# Altium PCB 深圳重合闸控制板.PcbDoc (part 1 of 2)
Units mm, origin at the board's own origin, x right, y up, seen from the top; angles counter-clockwise.
Board outline 137 x 115 mm, 2 copper layers (Top Layer, Bottom Layer); 314 components, 196 nets, 866 pads, 368 vias.
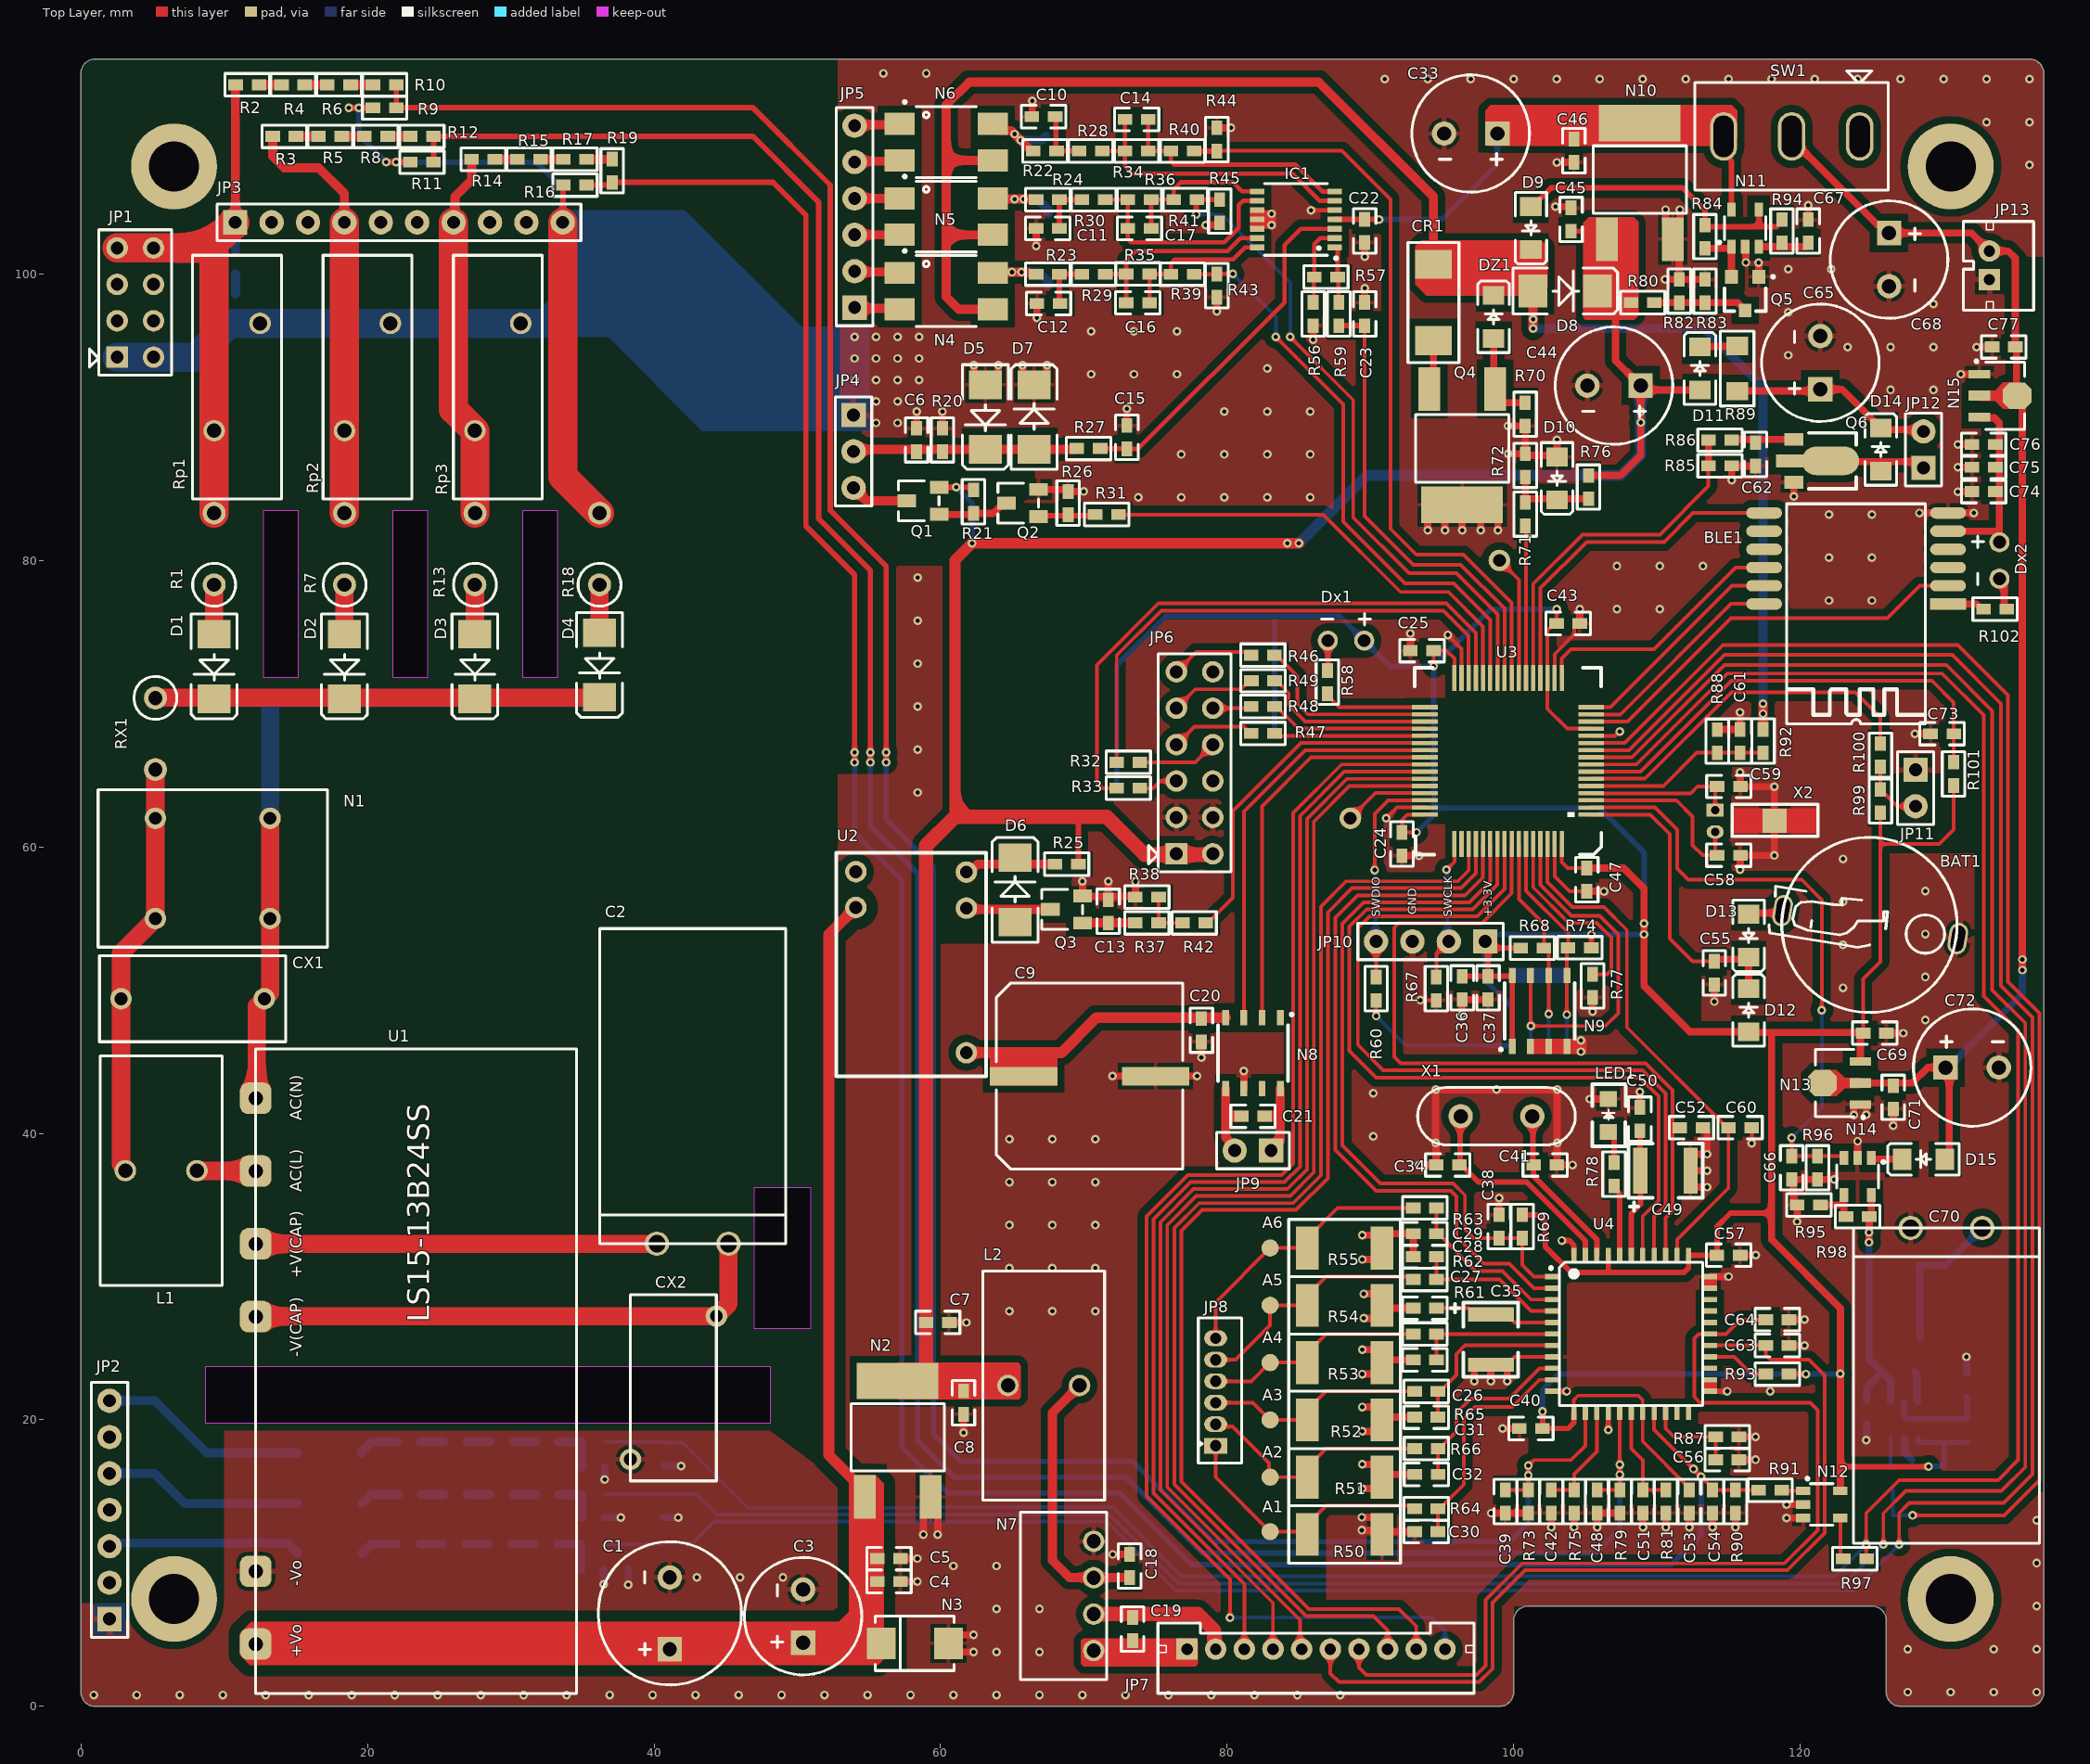
[diagram p0: Top Layer view]
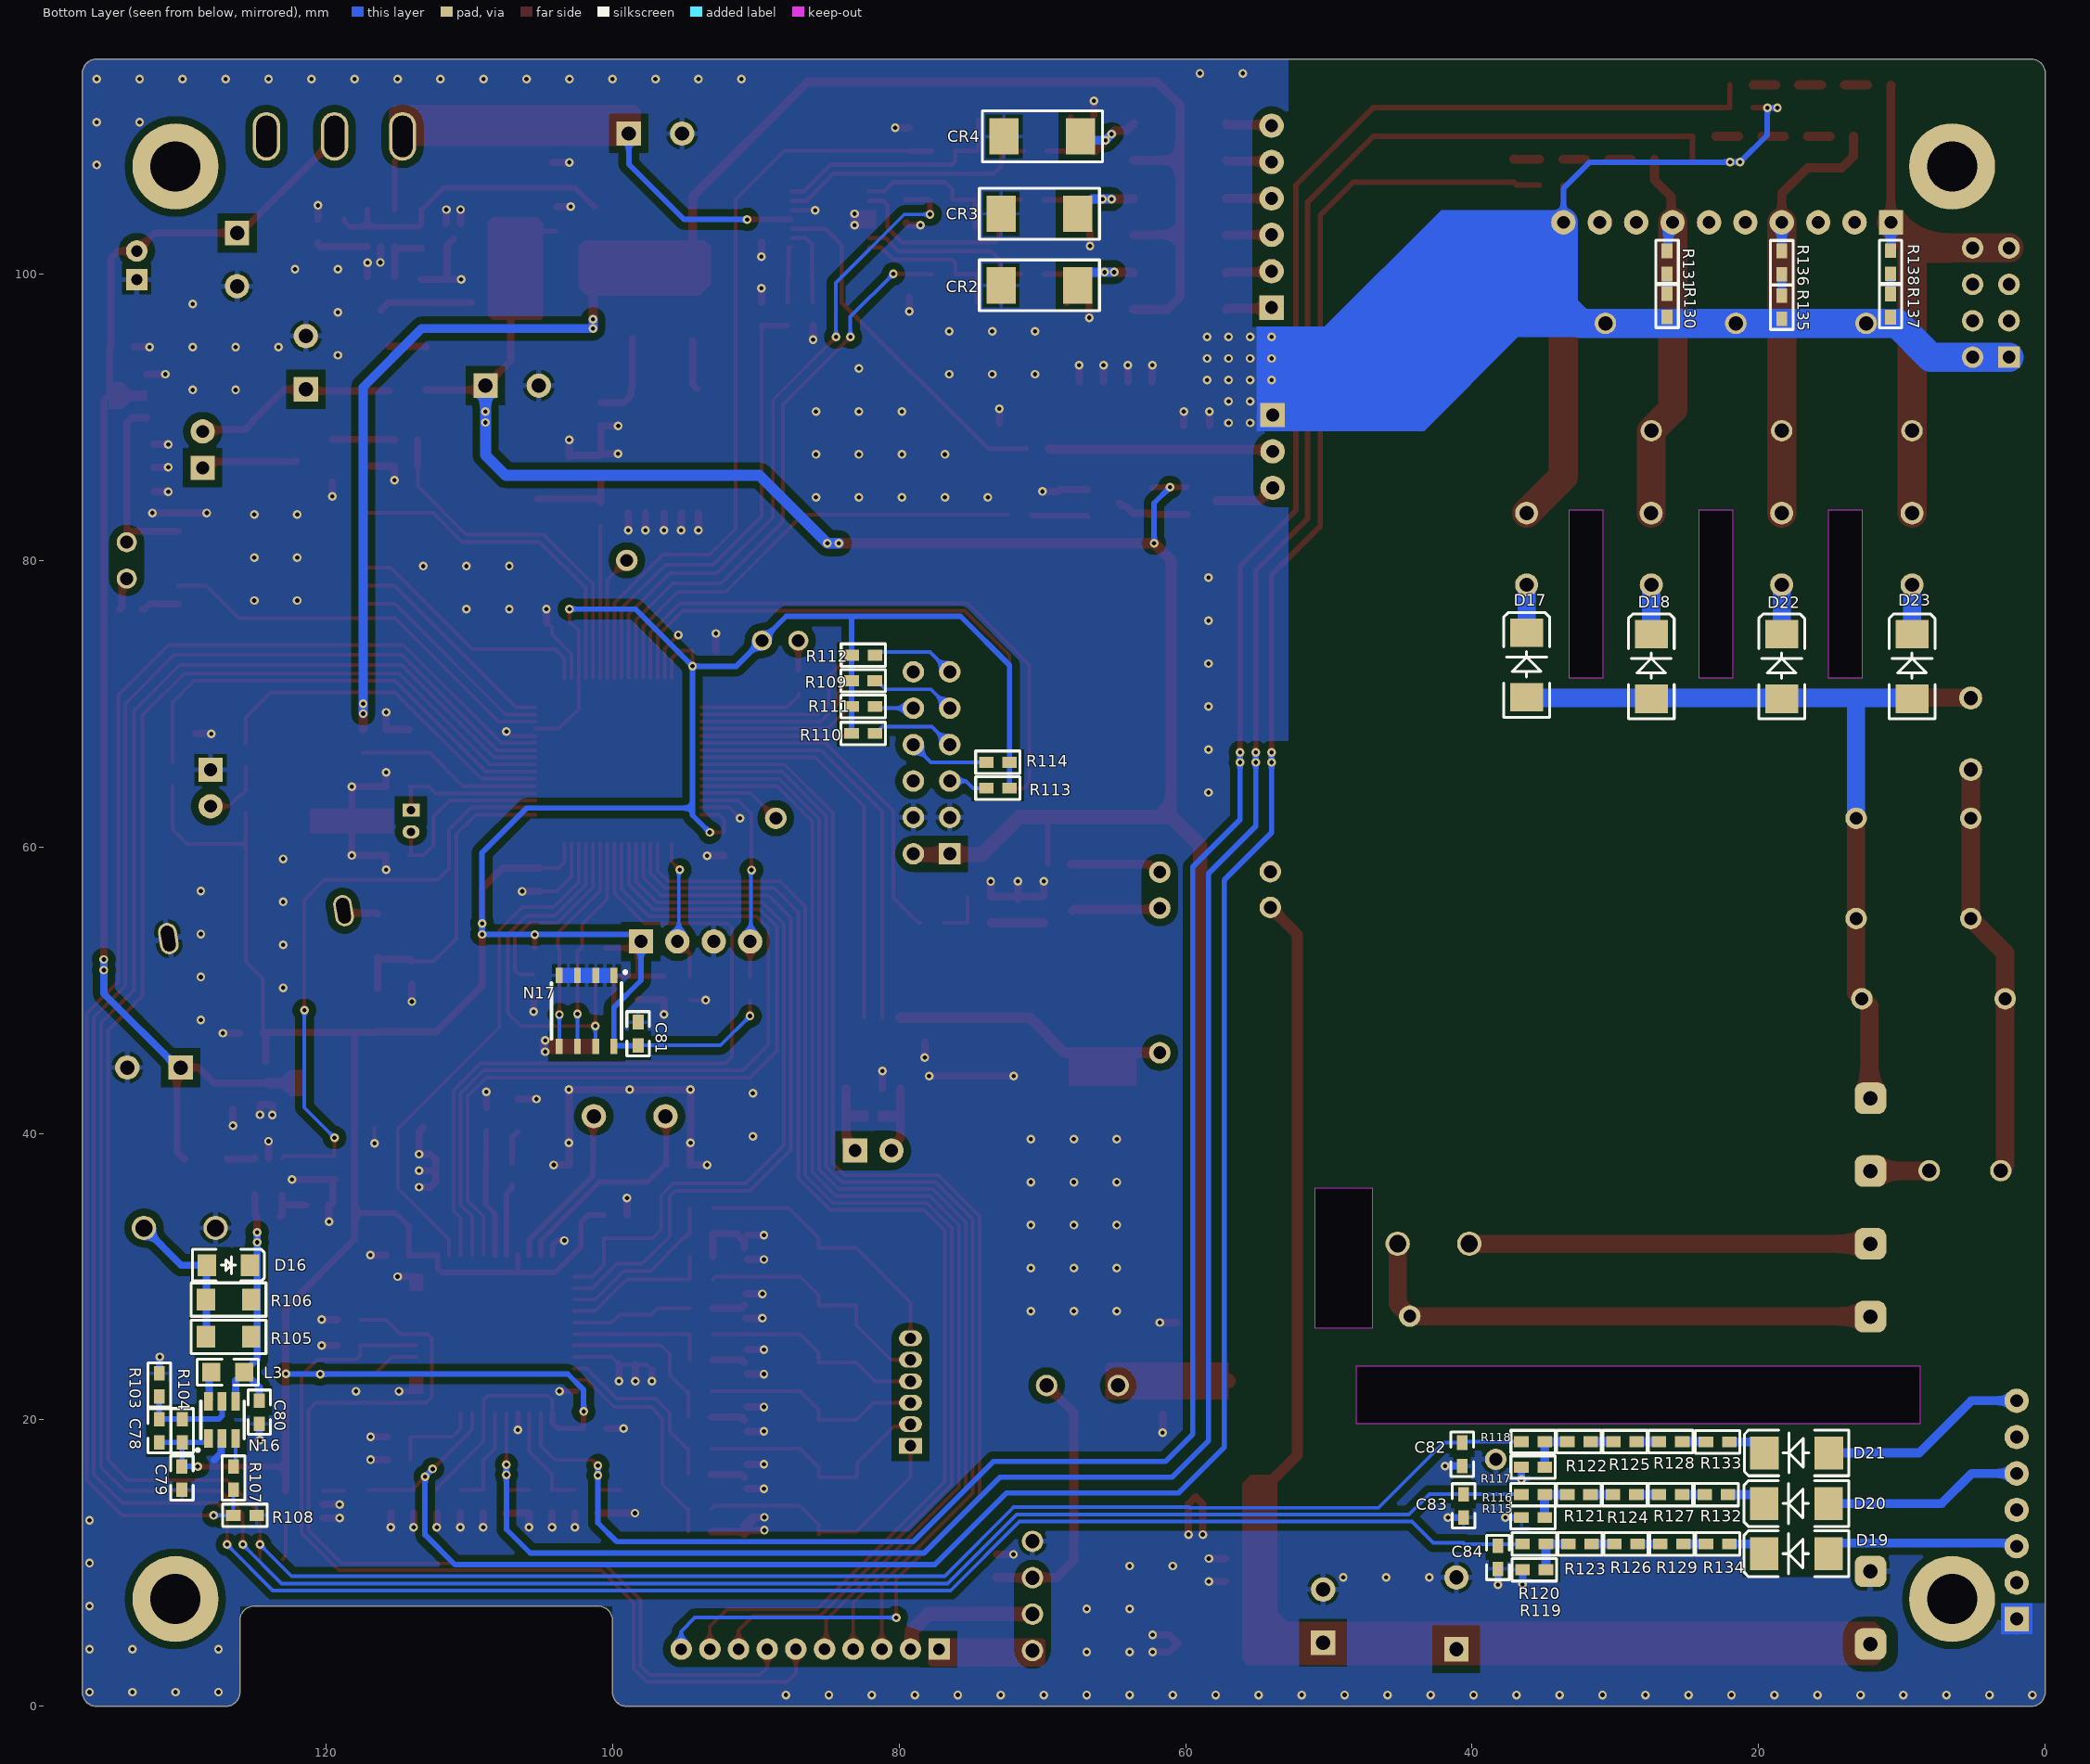
[diagram p1: Bottom Layer view, seen from below]

## Layer stack, top to bottom
Top Solder: solder mask 0.0102, Solder Resist, Dk 3.5
Top Layer: signal copper 0.0356
Dielectric 1: dielectric 0.32, FR-4, Dk 4.8
Bottom Layer: signal copper 0.0356
Bottom Solder: solder mask 0.0102, Solder Resist, Dk 3.5

## Board outline
0,1 ccw(c1,1) 1,0 99,0 ccw(c99,1) 100,1 100,6 cw(c101,6) 101,7 125,7 cw(c125,6) 126,6 126,1 ccw(c127,1) 127,0 136,0 ccw(c136,1) 137,1 137,114 ccw(c136,114) 136,115 1,115 ccw(c1,114) 0,114
cut-out: 46.966,36.2 46.966,26.4 50.966,26.4 50.966,36.2
cut-out: 48.1,23.745 48.1,19.745 8.7,19.745 8.7,23.745
cut-out: 30.846,83.5 33.246,83.5 33.246,71.8 30.846,71.8
cut-out: 21.8,83.5 24.2,83.5 24.2,71.8 21.8,71.8
cut-out: 12.745,83.5 15.145,83.5 15.145,71.8 12.745,71.8

## Design rules (kind name [scope] priority, off if disabled: settings)
Clearance Clearance_1 [InNet('+24V')] p1: gap=0.254 ignorepadtopadclearanceinfootprint=FALSE except(0: Arc-Hole Track-Hole SMDPad-Hole THPad-Hole Via-Hole Fill-Hole Poly-Hole Region-Hole Text-Hole; 0.2: SMDPad-SMDPad; 0.203: Track-SMDPad; 0.229: Track-Track; 0.8: Arc-Poly Track-Poly SMDPad-Poly THPad-Poly Via-Poly Fill-Poly Poly-Poly Poly-Region)
Clearance [All] p2: gap=0.254 ignorepadtopadclearanceinfootprint=FALSE except(0: Arc-Hole Track-Hole SMDPad-Hole THPad-Hole Via-Hole Fill-Hole Poly-Hole Region-Hole Text-Hole; 0.2: SMDPad-SMDPad; 0.203: Track-SMDPad; 0.229: Track-Track; 0.508: Arc-Poly Track-Poly SMDPad-Poly THPad-Poly Via-Poly Fill-Poly Poly-Poly Poly-Region)
ComponentClearance [All] p1 off: gap=0.254 collisioncheckmode=3 verticalgap=0.254 showdistances=FALSE
HoleSize [All] p1: absolutevalues=TRUE maxlimit=5 minlimit=0.025 maxpercent=80.000 minpercent=20.000
MinimumSolderMaskSliver [All] p1 off: minsoldermaskwidth=0.1
PolygonConnect [All] p1: thpad.connectstyle=Relief thpad.reliefconductorwidth=0.381 thpad.reliefentries=4 thpad.polygonreliefangle="90 Angle" thpad.airgapwidth=0.254 smdpad.connectstyle=Relief smdpad.reliefconductorwidth=0.254 smdpad.reliefentries=4 smdpad.polygonreliefangle="90 Angle" smdpad.airgapwidth=0.254 via.connectstyle=Direct via.reliefconductorwidth=0.254 via.reliefentries=4 via.polygonreliefangle="90 Angle" via.airgapwidth=0.254
RoutingVias [All] p1: holewidth=0.305 width=0.61 viastyle="Through Hole" minholewidth=0.2 minwidth=0.4 maxholewidth=0.711 maxwidth=1.27 useviatemplates=TRUE viatemplateguid#1={6C4FC0D5-3B55-4C98-B31F-713A288D57C1} viatemplatename#1=v61h30m0mx0
SilkToSilkClearance [All] p1 off: silktosilkclearance=0.254
SilkToSolderMaskClearance [IsPad] p1 off: minsilkscreentomaskgap=0.254 clearancetoexposedcopper=TRUE
SolderMaskExpansion [All] p1: expansion=0.102 istentingtop=FALSE
Width [All] p1: maxlimit=2.032 minlimit=0.254 preferedwidth=0.254 minimp=50.000000 maximp=50.000000 favimp=50.000000
25 further rules are at their usual default settings.

## Classes and differential pairs
component class 深圳重合闸控制板: A1 A2 A3 A4 A5 A6 BAT1 BLE1 C7 C14 C16 C24 C25 C26 C27 C35 C39 C41 C44 C46 C47 C48 C49 C50 C52 C56 C57 C59 C60 C61 C62 C63 C64 C65 C66 C67 C68 C69 C70 C72 C75 C76 C77 C79 C80 C81 C84 CR3 CX1 CX2 D1 D2 D5 D8 D14 D16 D17 D20 D21 D22 D23 Dx2 DZ1 IC1 JP5 JP6 JP7 JP8 JP9 JP12 L1 L2 L3 LED1 N2 N10 N11 N12 N15 N16 Q1 Q4 Q5 R4 R5 R7 R10 R12 R16 R19 R21 R23 R27 R30 R34 R36 R38 R39 R40 R42 R43 R50 R51 R54 R55 R56 R64 R66 R67 R68 R69 R71 R73 R75 R76 R77 R82 R83 R84 R85 R88 R89 R90 R91 R92 R93 R96 R97 R100 R101 R103 R105 R106 R107 R109 R113 R114 R115 R119 R121 R122 R123 R125 R127 R129 R130 R132 R133 R134 R136 R137 R138 Rp1 Rp2 SW1 U1 U4 X2

## Components (designator, comment, footprint, x,y, rotation, side; value= is the part's Value field where it differs from the comment)
A1 "TP" TP 83,12.2 r0 top
A2 "TP" TP 83,16 r0 top
A3 "TP" TP 83,20 r0 top
A4 "TP" TP 83,24 r0 top
A5 "TP" TP 83,28 r0 top
A6 "TP" TP 83,32 r0 top
BAT1 "" BATTERY 131,53.6 r180 top
BLE1 "BLE-TPT-BLUETEETH" 蓝牙 123.2,76.2 r180 top
C1 "470uF/35V" CAP_5.0SP 41.1,6.5 r90 top (schematic designator C60)
C2 "33uF/450V" EWH2WM330K20OT 42.7,32.3 r0 top (schematic designator C63)
C3 "220uF/35V" CAP 50.4,6.3 r90 top (schematic designator C61)
C4 "0.1uF/50V" C0603 56.395,8.719 r180 top (schematic designator C62)
C5 "0.33uF/35V" C0603 56.395,10.319 r180 top (schematic designator C65)
C6 "0.1uF" C0603 58.327,88.41 r270 top (schematic designator C46)
C7 "0.1uF/25V" C0603 59.8,26.8 r180 top (schematic designator C66)
C8 "2.2uF/25V" C0603 61.6,21.2 r90 top (schematic designator C67)
C9 "470uF/50V" RVT1H471M1213 70.4,44 r0 top (schematic designator C70)
C10 "0.1uF" C0603 67.187,110.981 r0 top (schematic designator C24)
C11 "0.1uF" C0603 67.482,103.181 r0 top (schematic designator C14)
C12 "0.1uF" C0603 67.533,97.93 r0 top (schematic designator C3)
C13 "0.1uF" C0603 71.7,55.5 r270 top (schematic designator C72)
C14 "1nF" C0603 73.682,110.781 r180 top (schematic designator C25)
C15 "0.1uF" C0603 73,88.6 r270 top (schematic designator C48)
C16 "1nF" C0603 73.765,97.982 r180 top (schematic designator C5)
C17 "1nF" C0603 73.882,103.181 r180 top (schematic designator C16)
C18 "2.2uF/25V" C0603 73.2,9.8 r270 top (schematic designator C68)
C19 "2.2uF/25V" C0603 73.4,5.4 r270 top (schematic designator C69)
C20 "0.1uF/50V" C0603 78.2,47.2 r90 top (schematic designator C71)
C21 "0.1uF/50V" C0603 81.8,41.2 r180 top (schematic designator C64)
C22 "0.1uF" C0603 89.6,103 r90 top (schematic designator C35)
C23 "0.1uF" C0603 89.6,97.2 r90 top (schematic designator C47)
C24 "0.1uF" C0603 92.2,60.2 r270 top (schematic designator C40)
C25 "0.1uF" C0603 93.6,73.7 r180 top (schematic designator C41)
C26 "10nF" C0603 93.8,24.194 r0 top (schematic designator C20)
C27 "120nF" C0603 93.8,27.8 r180 top (schematic designator C19)
C28 "10nF" C0603 93.8,31.4 r0 top (schematic designator C26)
C29 "10nF" C0603 93.8,33 r0 top (schematic designator C28)
C30 "10nF" C0603 93.895,12.2 r0 top (schematic designator C4)
C31 "10nF" C0603 93.897,20.187 r0 top (schematic designator C15)
C32 "10nF" C0603 93.905,16.2 r0 top (schematic designator C12)
C33 "220uF-16V" CAP 97,109.8 r180 top (schematic designator C51)
C34 "22pF" C0603 95.4,37.8 r180 top (schematic designator C11)
C35 "4.7UF/25V" CAK 98.4,25.6 r270 top (schematic designator C22)
C36 "0.1uF" C0603 96.407,50.156 r270 top (schematic designator C34)
C37 "0.1uF" c0603 98.207,50.156 r270 top (schematic designator C56)
C38 "120nF" C0603 98.986,33.505 r90 top (schematic designator C18)
C39 "10nF" C0603 99.419,14.305 r270 top (schematic designator C31)
C40 "0.1uF" C0603 101.2,19.4 r180 top (schematic designator C27)
C41 "22pF" C0603 102.2,37.8 r0 top (schematic designator C8)
C42 "10nF" C0603 102.619,14.305 r270 top (schematic designator C36)
C43 "0.1uF" C0603 103.8,75.6 r0 top (schematic designator C38)
C44 "220uF-35V" CAP 107,92.2 r180 top (schematic designator C33)
C45 "0.1uF" C0603 104,103.8 r270 top (schematic designator C49)
C46 "0.1uF" C0603 104.2,108.6 r270 top (schematic designator C50)
C47 "0.1uF" C0603 105.1,57.713 r270 top (schematic designator C39)
C48 "10nF" C0603 105.819,14.305 r270 top (schematic designator C42)
C49 "4.7UF/25V" CAK 110.6,37.4 r0 top (schematic designator C1)
C50 "0.1uF" C0603 108.8,41 r270 top (schematic designator C2)
C51 "10nF" C0603 109.019,14.305 r270 top (schematic designator C44)
C52 "110pF" C0603 112.4,40.4 r180 top (schematic designator C10)
C53 "120nF" C0603 112.257,14.305 r90 top (schematic designator C43)
C54 "10nF" C0603 113.876,14.305 r90 top (schematic designator C37)
C55 "0.1uF" C0603 114,51.2 r270 top (schematic designator C9)
C56 "10nF" C0603 114.907,17.219 r180 top (schematic designator C32)
C57 "0.1uF" C0603 115,31.5 r180 top (schematic designator C83)
C58 "15pF" C0603 115.013,59.419 r0 top (schematic designator C7)
C59 "15pF" C0603 115.013,64.219 r180 top (schematic designator C6)
C60 "110pF" C0603 115.8,40.4 r180 top (schematic designator C13)
C61 "0.1uF" C0603 115.794,67.387 r90 top (schematic designator C17)
C62 "1nF" C0603 116.879,87.4 r270 top (schematic designator C29)
C63 "10nF" C0603 118.4,25.2 r180 top (schematic designator C23)
C64 "10nF" C0603 118.4,27 r180 top (schematic designator C21)
C65 "470uF-25V" CAP 121.4,93.8 r90 top (schematic designator C30)
C66 "10nF" C0603 119.4,37.6 r270 top (schematic designator C76)
C67 "0.1uF" C0603 120.55,102.987 r90 top (schematic designator C52)
C68 "470uF-16V" CAP 126.2,101 r270 top (schematic designator C75)
C69 "0.1uF" C0603 125.2,47 r180 top (schematic designator C53)
C70 "10F/2.7V" EWH2WM330K20OT 130.2,33.4 r180 top (schematic designator C81)
C71 "0.1uF" C0603 126.489,42.517 r90 top (schematic designator C54)
C72 "470uF-16V" CAP 132,44.6 r0 top (schematic designator C55)
C73 "0.1uF" C0603 129.9,67.9 r180 top (schematic designator C84)
C74 "10uF" C0603 132.8,84.8 r0 top (schematic designator C59)
C75 "0.1uF" C0603 132.8,86.5 r0 top (schematic designator C73)
C76 "0.1uF" C0603 132.8,88.1 r0 top (schematic designator C58)
C77 "0.1uF" C0603 134.2,94.9 r0 top (schematic designator C74)
C78 "10pF" C0603 131.631,19.242 r270 bottom (schematic designator C77)
C79 "1uF" C0603 130.05,15.938 r270 bottom (schematic designator C78)
C80 "10uF" C0603 124.65,20.538 r270 bottom
C81 "0.1uF" c0603 98.207,46.956 r90 bottom (schematic designator C57)
C82 "0.1uF" C0603 40.7,17.6 r270 bottom (schematic designator C45)
C83 "0.1uF" C0603 40.6,14 r270 bottom (schematic designator C79)
C84 "0.1uF" C0603 38.2,10.4 r270 bottom (schematic designator C82)
CR1 "1R00" R2010 94.4,98 r90 top (schematic designator CR4)
CR2 "2R20" R2010 70.2,99.2 r180 bottom (schematic designator CR1)
CR3 "2R20" R2010 70.2,104.2 r180 bottom (schematic designator CR2)
CR4 "2R20" R2010 70,109.6 r180 bottom (schematic designator CR3)
CX1 "0.1uF/310VAC" X2-0310A104K10WLBY 7.8,49.4 r180 top
CX2 "2.2nF/400VAC" CT81-400VAC-222M 41.354,22.245 r90 top
D1 "8F2K" IN4007-M7 9.3,72.6 r0 top (schematic designator D11)
D2 "8F2K" IN4007-M7 18.4,72.6 r0 top (schematic designator D13)
D3 "8F2K" IN4007-M7 27.5,72.6 r0 top (schematic designator D14)
D4 "8F2K" IN4007-M7 36.2,72.7 r0 top (schematic designator D16)
D5 "IN4007-M7" IN4007-M7 63.127,90.01 r0 top
D6 "IN4007" IN4007-M7 65.2,57 r180 top (schematic designator D18)
D7 "IN4007-M7" IN4007-M7 66.527,90.01 r180 top (schematic designator D6)
D8 "IN4007-M7" IN4007-M7 103.6,98.8 r90 top (schematic designator D7)
D9 "IN4148-T4" IN4148-T4 101.2,103.2 r0 top (schematic designator D8)
D10 "IN4148-T4" IN4148-T4 103.022,85.721 r0 top (schematic designator D9)
D11 "IN4007W" IN4148-T4 113,93.4 r180 top (schematic designator D4)
D12 "IN4148-T4" IN4148-T4 116.394,48.6 r180 top (schematic designator D1)
D13 "IN4148-T4" IN4148-T4 116.394,53.8 r0 top (schematic designator D2)
D14 "SM4007PL /A7" IN4148-T4 125.611,87.743 r180 top (schematic designator D3)
D15 "FR107W /F7" IN4148-T4 128.6,38.2 r270 top (schematic designator D20)
D16 "FR107W /F7" IN4148-T4 126.8,30.8 r90 bottom (schematic designator D19)
D17 "8F2K" IN4007-M7 36.2,72.7 r0 bottom
D18 "8F2K" IN4007-M7 27.5,72.6 r0 bottom (schematic designator D15)
D19 "8F2K" IN4007-M7 17.371,10.662 r270 bottom (schematic designator D23)
D20 "8F2K" IN4007-M7 17.371,14.162 r270 bottom (schematic designator D22)
D21 "8F2K" IN4007-M7 17.35,17.7 r270 bottom
D22 "8F2K" IN4007-M7 18.4,72.6 r0 bottom (schematic designator D12)
D23 "8F2K" IN4007-M7 9.3,72.6 r0 bottom (schematic designator D10)
Dx1 "LED" LEDB 88.3,74.4 r180 top (schematic designator Dx2)
Dx2 "LEDA" LEDB 133.9,80 r270 top (schematic designator Dx1)
DZ1 "稳压 MMSZ15VCW /15VZ" IN4148-T4 98.6,97 r180 top
IC1 "MCP6004-I/ST" SOP14_0.65SP 84.8,103.8 r90 top
JP1 "CON8" SIP2*4_2.54SP 3.8,98 r90 top (schematic designator JP8)
JP2 "CON7" HDR2.54-7P 2,13.72 r90 top (schematic designator JP13)
JP3 "CON10" HDR2.54-10P 22.2,103.6 r0 top (schematic designator JP6)
JP4 "CON-3" HDR2.54-3P 53.927,87.61 r270 top (schematic designator JP5)
JP5 "CON-6" HDR2.54-6P 54,104 r90 top (schematic designator JP1)
JP6 "CON12" SIP2*6_2.54SP 77.73,65.87 r90 top (schematic designator JP7)
JP7 "CON10" PH2.0-10P 86.2,4 r0 top (schematic designator JP9)
JP8 "" SIP1*6_1.5SP 79.2,18.2 r90 top (schematic designator JP2)
JP9 "CON-2" HDR2.54-2P 81.8,38.8 r180 top (schematic designator JP11)
JP10 "CON4" HDR2.54-4P 94.2,53.4 r180 top (schematic designator JP12)
JP11 "CON-2" HDR2.54-2P 128.049,64.111 r270 top (schematic designator JP3)
JP12 "CON-2" HDR2.54-2P 128.601,87.731 r90 top (schematic designator JP4)
JP13 "CON-2" PH2.0-2P 133.2,100.6 r90 top (schematic designator JP10)
L1 "LDM 1.2mH" PDMTAT044125-6R8MLU 5.6,37.4 r90 top
L2 "LDM 6.8uH" PDMTAT044125-6R8MLU 67.2,22.4 r90 top
L3 "20uH" L0805 126.85,23.338 r0 bottom
LED1 "LEDA" LEDA 106.6,42.4 r0 top
N1 "LCM，60mH" LCM 9.2,58.5 r90 top (schematic designator N17)
N2 "CJ78M12" TO-252(DPAK) 57,18.8 r0 top (schematic designator N10)
N3 "SMBJ30A" SMBJ30A 58.2,4.4 r0 top (schematic designator N9)
N4 "MB6S" MB6S 60.4,98.8 r0 top (schematic designator N1)
N5 "MB6S" MB6S 60.4,104 r0 top (schematic designator N2)
N6 "MB6S" MB6S 60.4,109.2 r0 top (schematic designator N3)
N7 "B1212S-1WL" B1212S-1WL 68.585,7.712 r270 top (schematic designator N11)
N8 "MX302" SOP8_1.27SP_4*5SR 81.8,45.6 r270 top (schematic designator N12)
N9 "BL24C256A" SOP8_1.27SP_4*5SR 101.807,48.556 r90 top (schematic designator N8)
N10 "78M05" 78M05 108.8,106.6 r0 top (schematic designator N4)
N11 "LM321A-TR" SOT23-5 116.15,103.2 r90 top (schematic designator N5)
N12 "SOT23-5" SOT23-5 121.5,14.1 r0 top (schematic designator N14)
N13 "HT7533-1" HT7533-1 122.394,43.517 r90 top (schematic designator N6)
N14 "RS3236-ADJ8YF5" SOT23-5 124,37 r270 top (schematic designator N15)
N15 "HT7533-1" HT7533-1 134.3,91.5 r270 top (schematic designator N13)
N16 "SOT23-6" SOT23-6 127.25,19.995 r90 bottom
N17 "BL24C256A" SOP8_1.27SP_4*5SR 101.807,48.556 r270 bottom (schematic designator N7)
Q1 "SS8550" "S8050 /J3Y" 59.894,85.11 r90 top (schematic designator Q2)
Q2 "L8050QLT1G" "S8050 /J3Y" 66.84,84.95 r90 top (schematic designator Q4)
Q3 "L8050QLT1G" "S8050 /J3Y" 69.902,56.587 r90 top (schematic designator Q6)
Q4 "DH2240N06LD" 78M05 96.4,87.8 r180 top (schematic designator Q5)
Q5 "LN61CN2702MR-G" SOT23-3 116.15,98.8 r180 top (schematic designator Q3)
Q6 "BCX56-16/BL" BCX56-16/BL 119.55,85.45 r270 top (schematic designator Q1)
R1 "120R" 插针电阻#1 9.3,80.3 r90 top (schematic designator R65)
R2 "510K" R0603 11.613,113.2 r0 top (schematic designator R75)
R3 "510K" R0603 14.2,109.6 r0 top (schematic designator R73)
R4 "510K" R0603 14.813,113.2 r0 top (schematic designator R81)
R5 "510K" R0603 17.4,109.6 r0 top (schematic designator R79)
R6 "510K" R0603 18.013,113.2 r0 top (schematic designator R84)
R7 "120R" 插针电阻#2 18.4,80.3 r90 top (schematic designator R67)
R8 "510K" R0603 20.6,109.6 r0 top (schematic designator R83)
R9 "5.1K" R0603 21.2,111.6 r0 top (schematic designator R90)
R10 "510K" R0603 21.2,113.2 r0 top (schematic designator R87)
R11 "5.1K" R0603 23.8,107.8 r0 top (schematic designator R89)
R12 "510K" R0603 23.8,109.6 r0 top (schematic designator R86)
R13 "120R" 插针电阻#3 27.506,80.3 r90 top (schematic designator R68)
R14 "510K" R0603 28.079,108 r0 top (schematic designator R71)
R15 "510K" R0603 31.279,108 r0 top (schematic designator R77)
R16 "5.1K" R0603 34.479,106.2 r0 top (schematic designator R88)
R17 "510K" R0603 34.479,108 r0 top (schematic designator R82)
R18 "120R" 插针电阻#1 36.2,80.3 r90 top (schematic designator R69)
R19 "510K" R0603 37.079,107.2 r270 top (schematic designator R85)
R20 "300" R0603 60.127,88.41 r270 top (schematic designator R52)
R21 "10K" R0603 62.3,84.1 r90 top (schematic designator R45)
R22 "300" R0603 67.282,108.581 r180 top (schematic designator R23)
R23 "300" R0603 67.482,99.981 r180 top (schematic designator R2)
R24 "300" R0603 67.482,105.181 r180 top (schematic designator R12)
R25 "10K" R0603 68.8,58.8 r180 top (schematic designator R93)
R26 "10K" R0603 68.9,84 r270 top (schematic designator R42)
R27 "5.1K" R0603 70.327,87.81 r180 top (schematic designator R50)
R28 "2K" R0603 70.482,108.581 r180 top (schematic designator R24)
R29 "2K" R0603 70.682,99.981 r180 top (schematic designator R3)
R30 "2K" R0603 70.682,105.181 r180 top (schematic designator R13)
R31 "1K" R0603 71.6,83.2 r180 top (schematic designator R39)
R32 "100R" R0603 73.1,65.906 r180 top (schematic designator R101)
R33 "100R" R0603 73.1,64.1 r180 top (schematic designator R103)
R34 "3.6K" R0603 73.682,108.581 r180 top (schematic designator R28)
R35 "3.6K" R0603 73.765,99.994 r180 top (schematic designator R5)
R36 "3.6K" R0603 73.882,105.181 r180 top (schematic designator R15)
R37 "2K" R0603 74.4,54.7 r180 top (schematic designator R91)
R38 "10R" R0603 74.4,56.5 r180 top (schematic designator R92)
R39 "2K" R0603 76.882,99.981 r180 top (schematic designator R1)
R40 "2K" R0603 76.882,108.581 r180 top (schematic designator R22)
R41 "2K" R0603 77.082,105.181 r180 top (schematic designator R10)
R42 "100R" R0603 77.7,54.7 r180 top (schematic designator R105)
R43 "100K" R0603 79.282,99.181 r270 top (schematic designator R6)
R44 "100K" R0603 79.282,109.381 r90 top (schematic designator R29)
R45 "100K" R0603 79.482,104.381 r270 top (schematic designator R16)
R46 "100R" R0603 82.489,73.385 r0 top (schematic designator R66)
R47 "100R" R0603 82.495,67.919 r0 top (schematic designator R100)
R48 "100R" R0603 82.495,69.8 r0 top (schematic designator R97)
R49 "100R" R0603 82.5,71.6 r0 top (schematic designator R96)
R50 "R0207-50Ω" R0207 88.2,12 r90 top (schematic designator R8)
R51 "R0207-50Ω" R0207 88.2,16 r90 top (schematic designator R11)
R52 "R0207-50Ω" R0207 88.2,20 r90 top (schematic designator R19)
R53 "R0207-50Ω" R0207 88.2,24 r90 top (schematic designator R27)
R54 "R0207-50Ω" R0207 88.2,28 r90 top (schematic designator R33)
R55 "R0207-50Ω" R0207 88.2,32 r90 top (schematic designator R37)
R56 "36K" R0603 86,97.2 r270 top (schematic designator R53)
R57 "150K" R0603 86.895,99.781 r0 top (schematic designator R54)
R58 "620R" R0603 87,71.5 r90 top (schematic designator R64)
R59 "1K" R0603 87.8,97.2 r90 top (schematic designator R51)
R60 "10K" R0603 90.4,50.1 r90 top (schematic designator R138)
R61 "1.2K" R0603 93.8,25.994 r180 top (schematic designator R21)
R62 "1.2K" R0603 93.8,29.8 r180 top (schematic designator R30)
R63 "1.2K" R0603 93.8,34.8 r180 top (schematic designator R35)
R64 "1.2K" R0603 93.895,13.8 r180 top (schematic designator R4)
R65 "1.2K" R0603 93.897,21.987 r180 top (schematic designator R14)
R66 "1.2K" R0603 93.905,18 r180 top (schematic designator R9)
R67 "10K" R0603 94.6,50.1 r90 top (schematic designator R137)
R68 "10K" R0603 101.295,52.941 r180 top (schematic designator R58)
R69 "10k" R0603 100.592,33.505 r90 top (schematic designator R18)
R70 "240K" R0603 100.8,90.2 r270 top (schematic designator R57)
R71 "3.6K" R0603 100.813,83.23 r90 top (schematic designator R61)
R72 "3.6K" R0603 100.813,86.63 r270 top (schematic designator R62)
R73 "1.2K" R0603 101.019,14.305 r270 top (schematic designator R36)
R74 "10K" R0603 104.607,52.956 r180 top (schematic designator R59)
R75 "1.2K" R0603 104.219,14.305 r270 top (schematic designator R40)
R76 "18K" R0603 105.222,85.121 r90 top (schematic designator R63)
R77 "10K" R0603 105.5,50.3 r90 top (schematic designator R135)
R78 "510R" R0603 107,37.15 r90 top (schematic designator R7)
R79 "1.2K" R0603 107.419,14.305 r270 top (schematic designator R43)
R80 "10K" R0603 109,98 r0 top (schematic designator R49)
R81 "1.2K" R0603 110.619,14.305 r270 top (schematic designator R46)
R82 "10K" R0603 111.55,98.8 r270 top (schematic designator R48)
R83 "10K" R0603 113.35,98.8 r270 top (schematic designator R47)
R84 "220K" R0603 113.35,102.6 r90 top (schematic designator R56)
R85 "10K" R0603 114.4,86.6 r0 top (schematic designator R31)
R86 "330R" R0603 114.4,88.4 r180 top (schematic designator R34)
R87 "1.2K" R0603 114.907,18.819 r180 top (schematic designator R38)
R88 "24K" R0603 114.213,67.377 r270 top (schematic designator R20)
R89 "51R" R1206 115.6,93.4 r90 top (schematic designator R44)
R90 "1.2K" R0603 115.476,14.305 r90 top (schematic designator R41)
R91 "2K" R0603 117.9,15.1 r180 top (schematic designator R106)
R92 "24K" R0603 117.4,67.387 r270 top (schematic designator R17)
R93 "10k" R0603 118.4,23.2 r0 top (schematic designator R32)
R94 "10K" R0603 118.721,102.988 r90 top (schematic designator R55)
R95 "100K" R0603 120.6,35 r180 top (schematic designator R122)
R96 "24K" R0603 121.2,37.6 r270 top (schematic designator R113)
R97 "2K" R0603 123.813,10.3 r180 top (schematic designator R107)
R98 "220K" R0603 124,34.2 r180 top (schematic designator R125)
R99 "51K" R0603 125.594,63.2 r90 top (schematic designator R25)
R100 "24K" R0603 125.594,66.4 r90 top (schematic designator R26)
R101 "10K" R0603 130.7,65.1 r270 top (schematic designator R136)
R102 "1K" R0603 133.6,76.6 r180 top (schematic designator R60)
R103 "1K" R0603 131.631,22.442 r90 bottom (schematic designator R115)
R104 "2K" R0603 130.031,19.242 r90 bottom (schematic designator R114)
R105 "10R" R1206 126.8,25.8 r0 bottom (schematic designator R127)
R106 "10R" R1206 126.8,28.4 r0 bottom (schematic designator R123)
R107 "330R" R0603 126.45,15.938 r90 bottom (schematic designator R126)
R108 "100K" R0603 125.65,13.338 r180 bottom (schematic designator R133)
R109 "2K" R0603 82.5,71.6 r0 bottom (schematic designator R98)
R110 "2K" R0603 82.495,67.919 r0 bottom (schematic designator R102)
R111 "2K" R0603 82.495,69.8 r0 bottom (schematic designator R95)
R112 "2K" R0603 82.489,73.385 r0 bottom (schematic designator R94)
R113 "2K" R0603 73.1,64.1 r180 bottom (schematic designator R104)
R114 "2K" R0603 73.1,65.906 r180 bottom (schematic designator R99)
R115 "5.1K" R0603 35.755,13.181 r0 bottom (schematic designator R124)
R116 "1K" R0603 35.755,14.781 r0 bottom (schematic designator R121)
R117 "5.1K" R0603 35.75,16.7 r0 bottom (schematic designator R116)
R118 "1K" R0603 35.75,18.481 r0 bottom (schematic designator R112)
R119 "5.1K" R0603 35.666,9.535 r0 bottom (schematic designator R134)
R120 "1K" R0603 35.666,11.335 r0 bottom (schematic designator R132)
R121 "240K" R0603 32.555,14.781 r0 bottom (schematic designator R120)
R122 "240K" R0603 32.55,18.481 r0 bottom (schematic designator R111)
R123 "240K" R0603 32.466,11.335 r0 bottom (schematic designator R131)
R124 "240K" R0603 29.355,14.781 r0 bottom (schematic designator R119)
R125 "240K" R0603 29.337,18.481 r0 bottom (schematic designator R110)
R126 "240K" R0603 29.266,11.335 r0 bottom (schematic designator R130)
R127 "240K" R0603 26.155,14.781 r0 bottom (schematic designator R118)
R128 "240K" R0603 26.15,18.481 r0 bottom (schematic designator R109)
R129 "240K" R0603 26.066,11.335 r0 bottom
R130 "200K" R0603 26.4,97.8 r270 bottom (schematic designator R76)
R131 "200K" R0603 26.4,100.8 r270 bottom (schematic designator R70)
R132 "240K" R0603 22.955,14.781 r0 bottom (schematic designator R117)
R133 "240K" R0603 22.871,18.462 r0 bottom (schematic designator R108)
R134 "240K" R0603 22.866,11.335 r0 bottom (schematic designator R128)
R135 "200K" R0603 18.39,97.674 r270 bottom (schematic designator R78)
R136 "200K" R0603 18.39,100.79 r270 bottom (schematic designator R72)
R137 "200K" R0603 10.8,97.787 r270 bottom (schematic designator R80)
R138 "200K" R0603 10.8,100.813 r270 bottom (schematic designator R74)
Rp1 "14K681" 14K681 10.9,92.8 r270 top (schematic designator Rp3)
Rp2 "14K681" 14K681 20,92.8 r270 top
Rp3 "14K681" 14K681 29.1,92.8 r270 top (schematic designator Rp1)
RX1 "" 插针电阻#1 5.2,68.4 r270 top
SW1 "2档拨动开关" SW-3 119.4,109.6 r180 top
U1 "LS15-13B24SS" LS15-13B24SS-F 23.4,23.4 r0 top (schematic designator U3)
U2 "TL-4101-C-12V" TL4101 61.8,58.244 r0 top (schematic designator U4)
U3 "APM32E103RCT6-LQFP64" LQFP-64 99.6,66 r180 top (schematic designator U1)
U4 "ATT7022EU" LQFP44_0.8SP_10*10SR 108.2,26 r0 top (schematic designator U2)
X1 "KCS5.5296" CRYSTAL2 98.8,41.2 r180 top (schematic designator X2)
X2 "32.768KHZ" CRYSTAL1 114.063,62.569 r0 top (schematic designator X1)

## Footprints (in the part's own frame and the unit in brackets; to place one, negate y for a bottom-side part, rotate by r counter-clockwise, add the part's x,y. Pads: shape width x height; smd on the part's side, far side on the other; paste and mask are expansions set on the pad)
14K681 [mm]
  round 1.5 hole 1: 1(3.75,-1.6) 2(-3.75,1.6)
  silkscreen extent -8.5,-3.1 8.5,3.1, body extent -8.5,-3.1 8.5,3.1, height 18
78M05 [mm]
  rect 1.524x3.048 smd: 1(-2.3,-4.174) 3(2.3,-4.174)
  rect 5.7x2.54 smd: 2(0,3.92)
  silkscreen extent -3.25,-2.37 3.25,2.34, body extent -3.3,-4.71 3.3,4.54, height 2.31
B1212S-1WL [mm]
  round 1.5 hole 1: 1(-3.81,2.1) 2(-1.27,2.1) 3(1.27,2.1) 4(3.81,2.1)
  silkscreen extent -5.84,-3 5.84,3, body extent -5.84,-3 5.84,3, height 10.1
BATTERY [mm]
  oval 2.2x1.3 hole 0.9 slot 1.8 at 81 deg rot 81: 1(12.23,-1.95) 2(0,0)
  silkscreen extent 0.06,-7.06 13.19,5.16
BCX56-16/BL [mm]
  rect 0.9x1.3 smd: 1(-3,0) 3(0,0)
  rect 0.9x2.5 smd: 2(-1.5,0)
  oval 2x4 smd: 2(-1.5,2.55)
  silkscreen extent -3.45,1.04 0.45,4.35
C0603 [mil]
  rect 40x30 smd: 1(-32,0.01) 2(32,0.01)
  silkscreen extent -61,-31 61,31
c0603 [mil]
  rect 40x30 smd: 1(-32,0.01) 2(32,0.01)
  silkscreen extent -61,-31 61,31
CAK [mm]
  rect 1x3.2 smd: 1(-1.75,0) 2(1.75,0)
  silkscreen extent -2.6,-2.8 2.6,1.9
CAP [mm]
  rect 1.7x1.7 hole 1: 1(-1.86,0)
  round 1.7 hole 1: 2(1.86,0)
  silkscreen extent -4.1,-4.1 4.1,4.1
CAP_5.0SP [mm]
  rect 1.7x1.7 hole 1: 1(-2.5,0)
  round 1.7 hole 1: 2(2.5,0)
  silkscreen extent -5,-5 5,5
CRYSTAL1 [mm]
  rect 1.2x0.9 hole 0.6: 1(0,0)
  oval 1.2x0.9 hole 0.6: 2(0,-1.52)
  rect 1.7x1.7 smd: 3(4.15,-0.75)
  silkscreen extent 1.19,-1.84 7.17,0.41
CRYSTAL2 [mm]
  round 1.7 hole 1: 1(-2.5,0) 2(2.5,0)
  silkscreen extent -5.5,-2 5.5,2
CT81-400VAC-222M [mm]
  round 1.5 hole 0.9: 1(-5,3) 2(5,-3)
  silkscreen extent -6.5,-3 6.5,3, body extent -6.5,-3 6.5,3, height 12
EWH2WM330K20OT [mm]
  round 1.7 hole 1.2: 1(-2.5,0) 2(2.5,0)
  silkscreen extent -6.5,0 6.5,22, body extent -6.5,2 6.5,22, height 13
HDR2.54-2P [mm]
  rect 1.7x1.7 hole 0.9: 1(-1.27,0)
  round 1.7 hole 0.9: 2(1.27,0)
  silkscreen extent -2.54,-1.27 2.54,1.27, body extent -2.54,-1.27 2.54,1.27, height 8.5
HDR2.54-3P [mm]
  rect 1.7x1.7 hole 0.9: 1(-2.54,0)
  round 1.7 hole 0.9: 2(0,0) 3(2.54,0)
  silkscreen extent -3.81,-1.27 3.81,1.27, body extent -3.81,-1.27 3.81,1.27, height 8.5
HDR2.54-4P [mm]
  rect 1.7x1.7 hole 0.9: 1(-3.81,0)
  round 1.7 hole 0.9: 2(-1.27,0) 3(1.27,0) 4(3.81,0)
  silkscreen extent -5.08,-1.27 5.08,1.27, body extent -5.08,-1.27 5.08,1.27, height 8.5
HDR2.54-6P [mm]
  rect 1.7x1.7 hole 0.9: 1(-6.35,0)
  round 1.7 hole 0.9: 2(-3.81,0) 3(-1.27,0) 4(1.27,0) 5(3.81,0) 6(6.35,0)
  silkscreen extent -7.62,-1.27 7.62,1.27, body extent -7.62,-1.27 7.62,1.27, height 8.5
HDR2.54-7P [mm]
  rect 1.7x1.7 hole 0.9: 1(-7.62,0)
  round 1.7 hole 0.9: 2(-5.08,0) 3(-2.54,0) 4(0,0) 5(2.54,0) 6(5.08,0) 7(7.62,0)
  silkscreen extent -8.89,-1.27 8.89,1.27, body extent -8.89,-1.27 8.89,1.27, height 8.5
HDR2.54-10P [mm]
  rect 1.7x1.7 hole 0.9: 1(-11.43,0)
  round 1.7 hole 0.9: 2(-8.89,0) 3(-6.35,0) 4(-3.81,0) 5(-1.27,0) 6(1.27,0) 7(3.81,0) 8(6.35,0) 9(8.89,0) 10(11.43,0)
  silkscreen extent -12.7,-1.27 12.7,1.27, body extent -12.7,-1.27 12.7,1.27, height 8.5
HT7533-1 [mm]
  rect 0.6x1.5 smd: 1(-1.5,-1.8) 3(1.5,-1.8)
  oct 1.83x2 smd: 2(0,0.85)
  rect 0.7x1.5 smd: 2(0,-1.8)
  Top Layer region: -0.915,-0.15 -0.915,0.85 0.915,0.85 0.915,-0.15 0.35,-0.715 0.35,-1.8 -0.35,-1.8 -0.35,-0.715
  silkscreen extent -2.5,-2.1 2.35,1.35, body extent -2.35,-1.35 2.35,1.35, height 1.6
IN4007-M7 [mm]
  rect 2.3x2 smd: 1(0,2.25) 2(0,-2.25)
  silkscreen extent -1.6,-3.65 1.6,3.65
IN4148-T4 [mm]
  rect 1.5x1.3 smd: 1(0,1.5) 2(0,-1.5)
  silkscreen extent -1.1,-2.5 1.1,2.5
L0805 [mm]
  rect 1.27x1.27 smd: 1(-1.143,0) 2(1.143,0)
  silkscreen extent -2.14,-0.9 2.14,0.9
LCM [mm]
  round 1.5 hole 0.9: 1(-3.5,4) 2(-3.5,-4) 3(3.5,4) 4(3.5,-4)
  silkscreen extent -5.5,-8 5.5,8, body extent -5.5,-8 5.5,8, height 15
LEDA [mm]
  rect 1.2x1.1 smd: 1(0,-2.29) 2(0,0)
  silkscreen extent -1.11,-3.31 1.21,1.03
LEDB [mm]
  round 1.4 hole 0.9: 1(-1.27,0) 2(1.27,0)
  silkscreen extent -1.7,-1.9 1.7,-1.1
LQFP44_0.8SP_10*10SR [mm]
  rect 1x0.37 smd: 1(-5.5,4) 1(-5.5,4) 2(-5.5,3.2) 3(-5.5,2.4) 4(-5.5,1.6) 5(-5.5,0.8) 6(-5.5,0) 7(-5.5,-0.8) 8(-5.5,-1.6) 9(-5.5,-2.4) 10(-5.5,-3.2) 11(-5.5,-4) 23(5.5,-4) 24(5.5,-3.2) 25(5.5,-2.4) 26(5.5,-1.6) 27(5.5,-0.8) 28(5.5,0) 29(5.5,0.8) 30(5.5,1.6) 31(5.5,2.4) 32(5.5,3.2) 33(5.5,4)
  rect 0.37x1 smd: 12(-4,-5.5) 13(-3.2,-5.5) 14(-2.4,-5.5) 15(-1.6,-5.5) 16(-0.8,-5.5) 17(0,-5.5) 18(0.8,-5.5) 19(1.6,-5.5) 20(2.4,-5.5) 21(3.2,-5.5) 22(4,-5.5) 34(4,5.5) 35(3.2,5.5) 36(2.4,5.5) 37(1.6,5.5) 38(0.8,5.5) 39(0,5.5) 40(-0.8,5.5) 41(-1.6,5.5) 42(-2.4,5.5) 43(-3.2,5.5) 44(-4,5.5)
  silkscreen extent -5.7,-5 5,5, body extent -5,-5 5,5, height 1.6
LQFP-64 [mm]
  rect 1.8x0.3 smd: 1(-5.8,3.746) 2(-5.8,3.246) 3(-5.8,2.746) 4(-5.8,2.246) 5(-5.8,1.746) 6(-5.8,1.246) 7(-5.8,0.746) 8(-5.8,0.246) 9(-5.8,-0.254) 10(-5.8,-0.754) 11(-5.8,-1.254) 12(-5.8,-1.754) 13(-5.8,-2.254) 14(-5.8,-2.754) 15(-5.8,-3.254) 16(-5.8,-3.754) 33(5.8,-3.754) 34(5.8,-3.254) 35(5.8,-2.754) 36(5.8,-2.254) 37(5.8,-1.754) 38(5.8,-1.254) 39(5.8,-0.754) 40(5.8,-0.254) 41(5.8,0.246) 42(5.8,0.746) 43(5.8,1.246) 44(5.8,1.746) 45(5.8,2.246) 46(5.8,2.746) 47(5.8,3.246) 48(5.8,3.746)
  rect 0.3x1.8 smd: 17(-3.759,-5.8) 18(-3.259,-5.8) 19(-2.759,-5.8) 20(-2.259,-5.8) 21(-1.759,-5.8) 22(-1.259,-5.8) 23(-0.759,-5.8) 24(-0.259,-5.8) 25(0.241,-5.8) 26(0.741,-5.8) 27(1.241,-5.8) 28(1.741,-5.8) 29(2.241,-5.8) 30(2.741,-5.8) 31(3.241,-5.8) 32(3.741,-5.8) 49(3.741,5.8) 50(3.241,5.8) 51(2.741,5.8) 52(2.241,5.8) 53(1.741,5.8) 54(1.241,5.8) 55(0.741,5.8) 56(0.241,5.8) 57(-0.259,5.8) 58(-0.759,5.8) 59(-1.259,5.8) 60(-1.759,5.8) 61(-2.259,5.8) 62(-2.759,5.8) 63(-3.259,5.8) 64(-3.759,5.8)
  silkscreen extent -6.52,-6.5 6.52,6.55, body extent -6.53,-6.53 6.52,6.52, height 1.58
LS15-13B24SS-F [mm]
  rrect50% 2.2x2.2 hole 1: 1(-11.2,19.05) 3(-11.2,13.97) 5(-11.2,8.89) 7(-11.2,3.81) 14(-11.2,-13.97) 16(-11.2,-19.05)
  silkscreen extent -11.2,-22.5 11.2,22.5, body extent -11.2,-22.5 11.2,22.5, height 15
MB6S [mm]
  rect 2.1x1.55 smd: 1(-3.25,1.27) 2(-3.25,-1.27) 3(3.25,-1.27) 4(3.25,1.27)
  silkscreen extent -3,-2.47 2.1,2.9, body extent -2.1,-2.47 2.1,2.48, height 2.9
PDMTAT044125-6R8MLU [mm]
  round 1.5 hole 1: 1(0,-2.5) 2(0,2.5)
  silkscreen extent -8,-4.25 8,4.25, body extent -8,-4.25 8,4.25, height 14
PH2.0-2P [mm] "长：5.9mm，宽：4.7mm，高：6mm"
  rect 1.5x1.5 hole 0.8: 1(-1,0)
  round 1.5 hole 0.8: 2(1,0)
  silkscreen extent -3.13,-3.08 3.06,1.82, body extent -2.95,-3 2.95,1.7, height 6.01
PH2.0-10P [mm] "长：21.9mm，宽：4.7mm，高：6mm"
  rect 1.5x1.5 hole 0.8: 1(-9,0)
  round 1.5 hole 0.8: 2(-7,0) 3(-5,0) 4(-3,0) 5(-1,0) 6(1,0) 7(3,0) 8(5,0) 9(7,0) 10(9,0)
  silkscreen extent -11.03,-3.08 11.03,1.82, body extent -10.95,-3 10.95,1.7, height 6.01
R0207 [mm]
  rect 3x1.6 smd: 1(0,2.6) 2(0,-2.6)
  silkscreen extent -2,-3.9 2,3.9
R0603 [mil]
  rect 40x30 smd: 1(-32,0) 2(32,0)
  silkscreen extent -61,-31 61,31
R1206 [mil]
  rect 50x60 smd: 1(-62,0) 2(62,0)
  silkscreen extent -103,-46 103,46
R2010 [mil]
  rect 80x100 smd: 1(-105,0) 2(105,0)
  silkscreen extent -165,-70 165,70, body extent -98,-49 98,49, height 26
RVT1H471M1213 [mm]
  rect 4.7x1.3 smd: 1(-4.6,0) 2(4.6,0)
  silkscreen extent -6.5,-6.5 6.5,6.5, body extent -6.5,-6.5 6.5,6.5, height 13.5
"S8050 /J3Y" [mm]
  rect 0.9x1.3 smd: 1(-1.9,0) 2(0,0) 3(-0.95,2.24)
  silkscreen extent -2.34,0 0.44,2.84
SIP1*6_1.5SP [mm]
  rect 1.1x1.6 hole 0.8: 1(0,0)
  oval 1.1x1.6 hole 0.8: 2(1.5,0) 3(3,0) 4(4.5,0) 5(6,0) 6(7.5,0)
  silkscreen extent -1.2,-1.81 8.91,1.21
SIP2*4_2.54SP [mm]
  rect 1.5x1.5 hole 0.9: 1(-3.81,1.27)
  round 1.5 hole 0.9: 2(-3.81,-1.27) 3(-1.27,1.27) 4(-1.27,-1.27) 5(1.27,1.27) 6(1.27,-1.27) 7(3.81,1.27) 8(3.81,-1.27)
  silkscreen extent -5.08,-2.54 5.08,3.21
SIP2*6_2.54SP [mm]
  rect 1.5x1.5 hole 0.9: 1(-6.35,1.27)
  round 1.5 hole 0.9: 2(-6.35,-1.27) 3(-3.81,1.27) 4(-3.81,-1.27) 5(-1.27,1.27) 6(-1.27,-1.27) 7(1.27,1.27) 8(1.27,-1.27) 9(3.81,1.27) 10(3.81,-1.27) 11(6.35,1.27) 12(6.35,-1.27)
  silkscreen extent -7.62,-2.54 7.62,3.21
SMBJ30A [mm]
  rect 2x2.2 smd: 1(-2.35,0) 2(2.35,0)
  silkscreen extent -2.75,-1.9 2.75,1.9
SOP8_1.27SP_4*5SR [mm]
  rect 1.05x0.48 smd: 1(-2.475,1.905) 2(-2.475,0.635) 3(-2.475,-0.635) 4(-2.475,-1.905) 5(2.475,-1.905) 6(2.475,-0.635) 7(2.475,0.635) 8(2.475,1.905)
  silkscreen extent -2.8,-2.45 1.95,2.8, body extent -1.95,-2.45 1.95,2.45, height 1.75
SOP14_0.65SP [mm]
  rect 0.4x1 smd: 1(-1.95,-2.7) 2(-1.3,-2.7) 3(-0.65,-2.7) 4(0,-2.7) 5(0.65,-2.7) 6(1.3,-2.7) 7(1.95,-2.7) 8(1.95,2.7) 9(1.3,2.7) 10(0.65,2.7) 11(0,2.7) 12(-0.65,2.7) 13(-1.3,2.7) 14(-1.95,2.7)
  silkscreen extent -2.8,-2.9 2.5,2.2, body extent -2.5,-2.2 2.5,2.2, height 1.2
SOT23-3 [mm]
  rect 0.9x0.95 smd: 1(0.95,-1) 2(-0.95,-1) 3(0,1.35)
  silkscreen extent -2.05,-1.1 1.45,1.4
SOT23-5 [mm]
  rect 0.99x0.6 smd: 1(-1.295,0.95) 2(-1.295,0) 3(-1.295,-0.95) 4(1.295,-0.95) 5(1.295,0.95)
  silkscreen extent -1.1,-1.45 0.8,1.9, body extent -0.8,-1.45 0.8,1.45, height 1.25
SOT23-6 [mm]
  rect 1.3x0.6 smd: 1(-1.3,0.95) 2(-1.3,0) 3(-1.3,-0.95) 4(1.3,-0.95) 5(1.3,0) 6(1.3,0.95)
  silkscreen extent -2.21,-1.55 1.3,1.81
SW-3 [mm]
  oval 1.9x3.4 hole 1.4 slot 2.9 at 90 deg: 1(-4.75,0) 2(0,0) 3(4.75,0)
  silkscreen extent -6.75,-4.56 6.75,3.75
TL4101 [mm]
  round 1.5 hole 0.9: 1(0,0) 2(0,-2.52) 3(0,-12.61) 4(-7.71,-2.47) 5(-7.71,0.03)
  silkscreen extent -9.08,-14.26 1.39,1.34
TO-252(DPAK) [mm]
  rect 1.524x3.048 smd: 1(-2.3,-4.174) 3(2.3,-4.174)
  rect 5.7x2.54 smd: 2(0,3.92)
  silkscreen extent -3.25,-2.37 3.25,2.34
TP [mm]
  round 1.2 smd: 1(0,0)
X2-0310A104K10WLBY [mm]
  round 1.5 hole 0.9: 1(-5,0) 2(5,0)
  silkscreen extent -6.5,-3 6.5,3, body extent -7,-3 6.5,3, height 12
插针电阻#1 [mm]
  round 1.6 hole 1: 1(-2,0) 2(3,0)
  silkscreen extent -3.5,-1.5 -0.5,1.5
插针电阻#2 [mm]
  round 1.6 hole 1: 1(-2,-0.004) 2(3,0)
  silkscreen extent -3.5,-1.5 -0.5,1.49
插针电阻#3 [mm]
  round 1.6 hole 1: 1(-2,0.006) 2(3,0)
  silkscreen extent -3.5,-1.49 -0.5,1.5
蓝牙 [mm]
  rect 2.5x0.8 smd: 1(-7.112,-0.762)
  oval 2.5x0.8 smd: 2(-7.112,-2.032) 3(-7.112,-3.302) 4(-7.112,-4.572) 5(-7.112,-5.842) 6(-7.112,-7.112) 7(5.723,-7.112) 8(5.723,-5.842) 9(5.723,-4.572) 10(5.723,-3.302) 11(5.723,-2.032) 12(5.723,-0.762)
  silkscreen extent -5.53,-7.75 4.14,7.62

## Part data
BAT1: library part BATTERY, "Battery"
C1 C2 C3 C9 C33 C44 C65 C68 C70 C72: library part ELECTRO1, "电解电容"
C4 C5 C6 C7 C8 C10 C11 C12 C13 C14 C15 C16 C17 C18 C19 C20 C21 C22 C23 C24 C25 C26 C27 C28 C29 C30 C31 C32 C34 C36 C37 C38 C39 C40 C41 C42 C43 C45 C46 C47 C48 C50 C51 C52 C53 C54 C55 C56 C57 C58 C59 C60 C61 C62 C63 C64 C66 C67 C69 C71 C73 C74 C75 C76 C77 C78 C79 C80 C81 C82 C83 C84: library part C, "电容"
C35 C49: library part CAK
CR1 CR2 CR3 CR4: library part R, "采样电阻"
CX1: library part C, "X2-0310A104K10WLBY"
CX2: library part C, "CT81-400VAC-222M"
D1 D2 D3 D4 D5 D6 D7 D8 D9 D10 D11 D12 D13 D14 D15 D16 D17 D18 D19 D20 D21 D22 D23: library part DIODE, "二极管"
Dx1: library part LEDA, "发光二极管"
Dx2: "发光二极管"
DZ1: library part ZENER2, "Zener Diode"
IC1: library part 14A_1_1_1_1
JP1: "2*4pin连接器"
JP2: "直插 1*7P"
JP3 JP7: "1*10pin连接器"
JP4: "直插  1*3P"
JP5: "直插 XH2.54 1*6P"
JP6: "2*6pin连接器"
JP8: library part CON-6, "直插 1*6P"
JP9 JP11 JP12 JP13: "直插 1*2Pin"
JP10: "连接件 1*4Pin"
L1 L2: library part L, "电感(0.4A-4Ω)"
L3: library part L, "电感"
LED1: "LED,白发红"
N1: library part LCM, "共模电感"
N2: "线性LDO,500mA"
N3: library part TVS, "TVS"
N4 N5 N6: "整流器"
N7: "12转12隔离电源"
N8: "电机驱动芯片"
N9 N17: "EEPROM"
N10: "78M05 5V,500mA"
N11: library part SOT23-5
N13 N15: "LDO,100mA"
N14: "稳压器"
Q1: library part PNP, "PNP三极管"
Q2 Q3: library part BCX56-16/BL, "NPN三极管"
Q4: library part 2N7002, "贴片场效应管,江苏长电", Text Field1=贴片N沟道场效应管, Text Field2=2N7002,江苏长电, Text Field3=SOT-23
Q6: "NPN三极管"
R1 R2 R3 R4 R5 R6 R7 R8 R9 R10 R11 R12 R13 R14 R15 R16 R17 R18 R19 R20 R21 R22 R23 R24 R25 R26 R27 R28 R29 R30 R31 R32 R33 R34 R35 R36 R37 R38 R39 R40 R41 R42 R43 R44 R45 R46 R47 R48 R49 R50 R51 R52 R53 R54 R55 R56 R57 R58 R59 R60 R61 R62 R63 R64 R65 R66 R67 R68 R69 R70 R71 R72 R73 R74 R75 R76 R77 R78 R79 R80 R81 R82 R83 R84 R85 R86 R87 R88 R89 R90 R91 R92 R93 R94 R95 R96 R97 R98 R99 R100 R101 R102 R103 R104 R105 R106 R107 R108 R109 R110 R111 R112 R113 R114 R115 R116 R117 R118 R119 R120 R121 R122 R123 R124 R125 R126 R127 R128 R129 R130 R131 R132 R133 R134 R135 R136 R137 R138: library part R, "电阻"
Rp1 Rp2 Rp3: library part 14D, "压敏电阻"
RX1: library part R, "保险丝"
SW1: library part SW-3
U1: "开关电源模块"
U2: "继电器", BOM_Manufacturer=HUIKE, BOM_Manufacturer Part=HK4100F-DC5V-SHG, BOM_Supplier=LCSC, BOM_Supplier Part=C12072, Contributor=hxf7582, image=//image.lceda.cn/szlcsc/C12072.jpg, spicePre=K, spiceSymbolName=TL4101
U3: "单片机"
X1 X2: library part CRYSTAL, "晶振"

## Free pads (board coordinates)
  round 6 hole 3.5: 00(6.5,7.5) 00(6.5,107.5) 00(130.5,7.5) 00(130.5,107.5)
  round 1.5 hole 0.9: 4(99,80) 5(88.6,62)

## Via types
v1: diameter 0.61, hole 0.305, Top Layer to Bottom Layer, tented both sides, 368 vias

## Nets (pads, with @x,y where several pads share a name; then routed paths per layer and width w, separated by ;. In a path a pad name is that pad's centre, name@x,y a point inside that pad or via, vN(x,y) a via of type N, cw(c..) or ccw(c..) an arc to the next point about the centre after c; other vN are vias at no path point)
+1.8V: C49.1 C50.2 U4.39 | length 9
  Top Layer w0.381: U4.39@108.2,31.5 108.2,34.4 108.85,35.05 C49.1@108.85,37.4 108.825,37.425 108.825,40.162 C50.2@108.8,40.187
+3.3V: C24.1 C25.1 C36.1 C37.1 C40.1 C43.1 C47.1 C53.2 C57.2 C69.2 C78.2 C79.1 C81.1 D12.1 Dx1.1 JP10.1 N9.1 N9.8 N12.5 N13.3 N16.1 N17.8 R60.1 R68.2 R69.2 R74.1 R93.2 R99.1 R101.2 R104.1 R109.2 R110.2 R111.2 R112.2 R113.2 R114.2 U3.13 U3.19 U3.32 U3.48 U3.64 U4.12 U4.18 U4.34 U4.41 | length 320.4
  Top Layer w0.254: v1(90.4,48.2) R60.1@90.4,49.287 ; v1(93.213,61.013) C24.1@92.2,61.013 92.2,61.9 92.554,62.254 U3.48@93.8,62.254 ; v1(94.413,72.613) C25.1@94.413,73.7 95.3,73.7 95.859,73.141 U3.32@95.859,71.8 ; JP10.1@98.01,53.4 98.207,53.203 JP10.1@98.469,52.941 ; v1(103,76.6) 103,75.613 C43.1@102.987,75.6 102.86,75.6 102.359,75.099 U3.19@102.359,71.8 102.359,69.641 103.746,68.254 U3.13@105.4,68.254 ; U3.64@103.359,60.2 103.359,58.941 103.774,58.526 C47.1@105.1,58.526 ; U4.12@104.2,20.5 104.2,21.4 104.5,21.7 108.7,21.7 109,21.4 U4.18@109,20.5 109,18.502 112.257,15.245 C53.2@112.257,15.118 ; C69.2@124.387,47 124.387,50.787 125.594,51.994 125.594,60.198 ; R99.1@125.594,62.387 125.594,60.198 ; R101.2@130.7,64.287 130.7,61.2 129.698,60.198 125.594,60.198
  Top Layer w0.381: C36.1@96.407,50.968 C37.1@98.207,50.968 ; JP10.1@98.207,53.203 C37.1@98.207,50.968 ; JP10.1@98.469,52.941 R68.2@100.482,52.941 ; N9.1@99.902,46.081 N9.8@99.902,51.018 ; N9.8@99.902,51.031 N9.8@99.902,51.018 ; R69.2@100.592,34.318 101.682,34.318 102.2,33.8 102.2,32.1 104,30.3 106.587,30.3 ; v1(102.013,20.587) C40.1@102.013,19.4 103.8,19.4 104.195,19.795 104.195,20.495 U4.12@104.2,20.5 ; R74.1@105.419,52.956 v1(105.419,53.881) ; U4.41@106.6,31.5 106.6,30.313 106.587,30.3 ; 118,34.437 115.137,34.437 114.187,33.487 C57.2@114.187,31.5 U4.34@112.2,31.5 112.2,30.6 111.9,30.3 106.587,30.3 ; R93.2@119.213,23.2 v1(120.4,23.2) ; 122.795,16.742 128.942,16.742 v1(128.95,16.75) ; C37.1@98.207,50.968 99.852,50.968 N9.8@99.902,51.018
  Top Layer w0.508: C47.1@105.1,58.526 107.674,58.526 109.1,57.1 v1(109.1,53.894) 109.1,50.3 112.3,47.1 D12.1@116.394,47.1 116.444,47.05 118.029,47.05 ; N12.5@122.795,15.05 122.795,16.742 v1(122.795,23.214) 122.795,27.805 118,32.6 118,34.437 118,47.021 118.029,47.05 ; N13.3@124.194,45.017 124.194,46.873 124.321,47 C69.2@124.387,47 124.337,47.05 118.029,47.05
  Bottom Layer w0.254: v1(90.4,48.2) 92.457,46.143 C81.1@98.207,46.143
  Bottom Layer w0.381: R113.2@72.287,64.1 R114.2@72.287,65.906 72.287,72.687 75.7,76.1 83.315,76.1 ; R110.2@83.308,67.919 83.305,67.922 83.305,69.8 83.305,71.6 83.305,73.382 R112.2@83.301,73.385 83.301,76.086 83.315,76.1 ; v1(93.213,61.013) 94.413,62.213 94.413,62.713 ; C81.1@98.207,46.143 98.238,46.112 99.871,46.112 N17.8@99.902,46.081 99.902,48.798 98.01,50.69 JP10.1@98.01,53.4 98.504,53.894 105.419,53.894 v1(109.1,53.894) v1(109.1,54.66) 109.1,59.6 105.987,62.713 94.413,62.713 ; v1(102.013,20.587) 102.013,22.088 103.125,23.2 v1(120.4,23.2) 120.407,23.207 122.788,23.207 v1(122.795,23.214) ; v1(103,76.6) 98.4,76.6 v1(94.413,72.613) ; N16.1@128.2,18.695 128.2,18.539 128.31,18.43 R104.1@130.031,18.43 ; v1(128.95,16.75) C79.1@130.05,16.75 130.041,16.76 130.041,18.42 R104.1@130.031,18.43 ; C78.2@131.631,18.43 R104.1@130.031,18.43 ; 83.315,76.1 87.87,76.1 Dx1.1@89.57,74.4 91.357,72.613 v1(94.413,72.613) ; 94.413,62.713 v1(94.413,72.613)
+3.3V_BLUE: BLE1.5 C74.2 C75.2 C76.2 Dx2.1 N15.3 | length 13.8
  Top Layer w0.5: BLE1.5@130.312,82.042 133.878,82.042 133.9,82.02 ; N15.3@132.5,90 132.55,89.95 133.55,89.95 133.9,89.6 133.9,82.02 ; Dx2.1@133.9,81 133.9,82.02
+5V: C68.1 C71.2 C72.1 C77.2 D15.1 JP13.2 N13.2 N15.2 SW1.2 | length 92.2
  Top Layer w0.5: SW1.2@119.4,109.6 119.4,109.229 120.047,108.582 120.218,108.582 125.34,103.46 125.6,103.46 C68.1@126.2,102.86 131.94,102.86 JP13.2@133.2,101.6 134.5,101.6 135.013,101.087 C77.2@135.013,94.9 135.081,94.832 135.081,91.569 N15.2@135.15,91.5 135.5,91.15 v1(135.5,52.144) v1(135.5,51.4) ; N13.2@124.194,43.517 126.489,43.517 127.817,43.517 128.9,44.6 130.34,44.6 130.4,44.54 130.4,38.7 D15.1@129.9,38.2
  Bottom Layer w0.5: C72.1@130.34,44.6 135.5,49.76 v1(135.5,51.4) v1(135.5,52.144)
+12V: C7.2 C8.2 C44.1 C45.2 D8.2 D11.1 JP6.1 JP6.2 L2.2 N2.2 N10.1 Q1.2 R21.2 R25.1 R76.2 R80.1 | length 167.3
  Top Layer w0.381: Q1.2@59.894,85.11 v1(61.092,85.11) 62.29,85.11 R21.2@62.368,85.032 ; 69.535,62.1 69.613,62.022 R25.1@69.613,58.8 ; C45.2@104,102.987 105.013,102.987 105.2,102.8
  Top Layer w0.5: R76.2@105.222,85.933 107.433,85.933 108.86,87.36 v1(108.86,89.629) v1(108.86,90.4) C44.1@108.86,92.2 ; 107.1,97.35 107.1,93.96 C44.1@108.86,92.2 ; D11.1@113,91.9 109.16,91.9 C44.1@108.86,92.2
  Top Layer w0.762: 61,62.1 61,63.093 ; 61.9,62.1 61.9,62.193 61,63.093 ; v1(85,81.2) v1(84.198,81.2) v1(62.2,81.2) 61,80 61,63.093
  Top Layer w1.016: N2.2@57,22.72 58.098,22.72 58.987,23.609 C7.2@58.987,26.8 58.987,60.087 61,62.1 61.9,62.1 69.535,62.1 71.6,62.1 74.242,59.458 78.938,59.458 JP6.2@79,59.52
  Bottom Layer w0.381: v1(61.092,85.11) 62.2,84.002 v1(62.2,81.2)
  Bottom Layer w0.762: v1(84.198,81.2) v1(85,81.2) 89.733,85.933 107.433,85.933 108.86,87.36 v1(108.86,89.629) v1(108.86,90.4) C44.1@108.86,92.2
+12V_GND: C19.1 JP7.2 N7.3 | length 10.2
  Top Layer w1: N7.3@70.685,6.442 77.959,6.442 79.104,5.296 79.104,4.096 JP7.2@79.2,4
+12V_OUT: C19.2 JP7.1 N7.4
+24V: C1.1 C3.1 C4.2 C5.2 N2.1 N3.1 U1.16 U2.4 | length 43.2
  Top Layer w0.762: U2.4@54.09,55.774 52.2,53.884 52.2,17.55 53.981,15.769 54.319,15.769 54.7,15.388 N2.1@54.7,14.626
A: JP1.7 JP1.8 JP3.1 R1.2 R2.1 R138.1 Rp1.1 | length 39.2
  Top Layer w0.254: R2.1@10.77,113.17 R2.1@10.8,113.2
  Top Layer w0.635: JP3.1@10.77,103.6 10.785,103.615 10.785,113.155 R2.1@10.77,113.17
  Top Layer w2.032: JP1.7@2.53,101.81 JP1.8@5.07,101.81 8.98,101.81 ; R1.2@9.3,83.3 Rp1.1@9.3,89.05 9.3,101.49 8.98,101.81 ; JP3.1@10.77,103.6 8.98,101.81
  Bottom Layer w0.635: JP3.1@10.77,103.6 10.785,103.585 10.785,101.641 R138.1@10.8,101.626
B: JP3.4 R3.1 R7.2 R136.1 Rp2.1 | length 31.8
  Top Layer w0.635: R3.1@13.387,109.6 13.387,108.213 14.2,107.4 16.6,107.4 18.39,105.61 JP3.4@18.39,103.6
  Top Layer w2.032: R7.2@18.39,83.3 JP3.4@18.39,103.6
  Bottom Layer w0.635: R136.1@18.39,101.602 JP3.4@18.39,103.6
BLUE_AT: BLE1.7 U3.20 | length 24
  Top Layer w0.254: U3.20@101.867,71.8 101.867,78.067 105.092,81.292 110.492,81.292 112.512,83.312 BLE1.7@117.477,83.312
BLUE_RST: BLE1.12 U3.15 | length 15.3
  Top Layer w0.254: U3.15@105.4,69.246 107.446,69.246 115.162,76.962 BLE1.12@117.477,76.962
BLUE_RX: BLE1.10 U3.17 | length 18.1
  Top Layer w0.254: U3.17@103.359,71.8 103.359,73.159 104,73.8 109.8,73.8 115.502,79.502 BLE1.10@117.477,79.502
BLUE_SLEEP: BLE1.2 U3.14 | length 28.8
  Top Layer w0.254: U3.14@105.4,68.738 107.938,68.738 115.172,75.972 126.072,75.972 128.332,78.232 BLE1.2@130.312,78.232
BLUE_TX: BLE1.11 U3.16 | length 15.6
  Top Layer w0.254: U3.16@105.4,69.754 106.754,69.754 115.232,78.232 BLE1.11@117.477,78.232
BOOT0: R77.2 U3.60 | length 13.6
  Top Layer w0.254: U3.60@101.359,60.2 101.359,57.176 103.835,54.7 105.781,54.7 106.8,53.681 106.8,51.4 106.513,51.113 R77.2@105.5,51.113
C: JP3.7 R13.2 R14.1 R131.1 Rp3.1 | length 28
  Top Layer w0.635: JP3.7@26.01,103.6 26.102,103.693 26.102,105.403 27.266,106.566 R14.1@27.266,108
  Top Layer w2.032: JP3.7@26.01,103.6 26.01,90.54 Rp3.1@27.5,89.05 R13.2@27.5,83.3
  Bottom Layer w0.635: JP3.7@26.01,103.6 26.01,103.312 26.337,102.985 26.337,101.676 R131.1@26.4,101.613
CF1: C63.2 JP7.6 U4.27 | length 63.7
  Top Layer w0.254: JP7.6@87.2,4 87.2,2.3 87.8,1.7 97.6,1.7 98.534,2.634 98.534,7.234 100.8,9.5 119.1,9.5 121.7,12.1 121.7,23.1 120.6,24.2 117.9,24.2 117.6,24.5 117.6,25.137 C63.2@117.663,25.2 ; U4.27@113.7,25.2 C63.2@117.587,25.2
CF2: C64.2 JP7.7 U4.28 | length 67.4
  Top Layer w0.254: JP7.7@89.2,4 89.2,2.7 89.717,2.183 97.4,2.183 98.052,2.834 98.052,7.434 100.6,9.983 118.9,9.983 121.217,12.3 121.217,20.683 120.7,21.2 113,21.2 112.6,21.6 112.6,25.7 112.9,26 U4.28@113.7,26 114.8,26 115.8,27 C64.2@117.587,27
CS: C60.2 U3.62 U4.35 | length 36.8
  Top Layer w0.254: U3.62@102.359,60.2 102.359,57.541 104.1,55.8 106.3,55.8 107.9,54.2 107.9,47.4 114.606,40.694 114.606,40.654 114.86,40.4 C60.2@114.987,40.4 114.987,36.187 111.4,32.6 U4.35@111.4,31.5
DIN: U3.56 U4.37 | length 57.2
  Top Layer w0.254: U3.56@99.359,60.2 99.359,57.059 97.452,55.152 89.935,55.152 89.124,54.341 89.124,46.176 90.9,44.4 92.5,44.4 109,44.4 110.6,42.8 110.6,35 109.8,34.2 U4.37@109.8,31.5
DOUT: U3.55 U4.38 | length 57.5
  Top Layer w0.254: U3.55@98.859,60.2 98.859,57.359 97.135,55.635 89.735,55.635 88.53,54.43 88.53,45.77 90.4,43.9 108.8,43.9 110.117,42.583 110.117,35.317 109,34.2 U4.38@109,31.5
EN: C66.1 N14.3 R96.1 U3.2 | length 42.8
  Top Layer w0.254: U3.2@105.4,62.754 109.846,62.754 111.4,61.2 111.4,58.5 112.2,57.7 120.1,57.7 121.5,56.3 v1(121.5,48.6) ; v1(119.4,39.7) 119.4,38.413 R96.1@121.2,38.413 122.94,38.413 123.05,38.303 N14.3@123.05,38.295
  Bottom Layer w0.254: v1(119.4,39.7) 121.5,41.8 v1(121.5,48.6)